# EAGLE board NCP1200 (EAGLE 6.2)
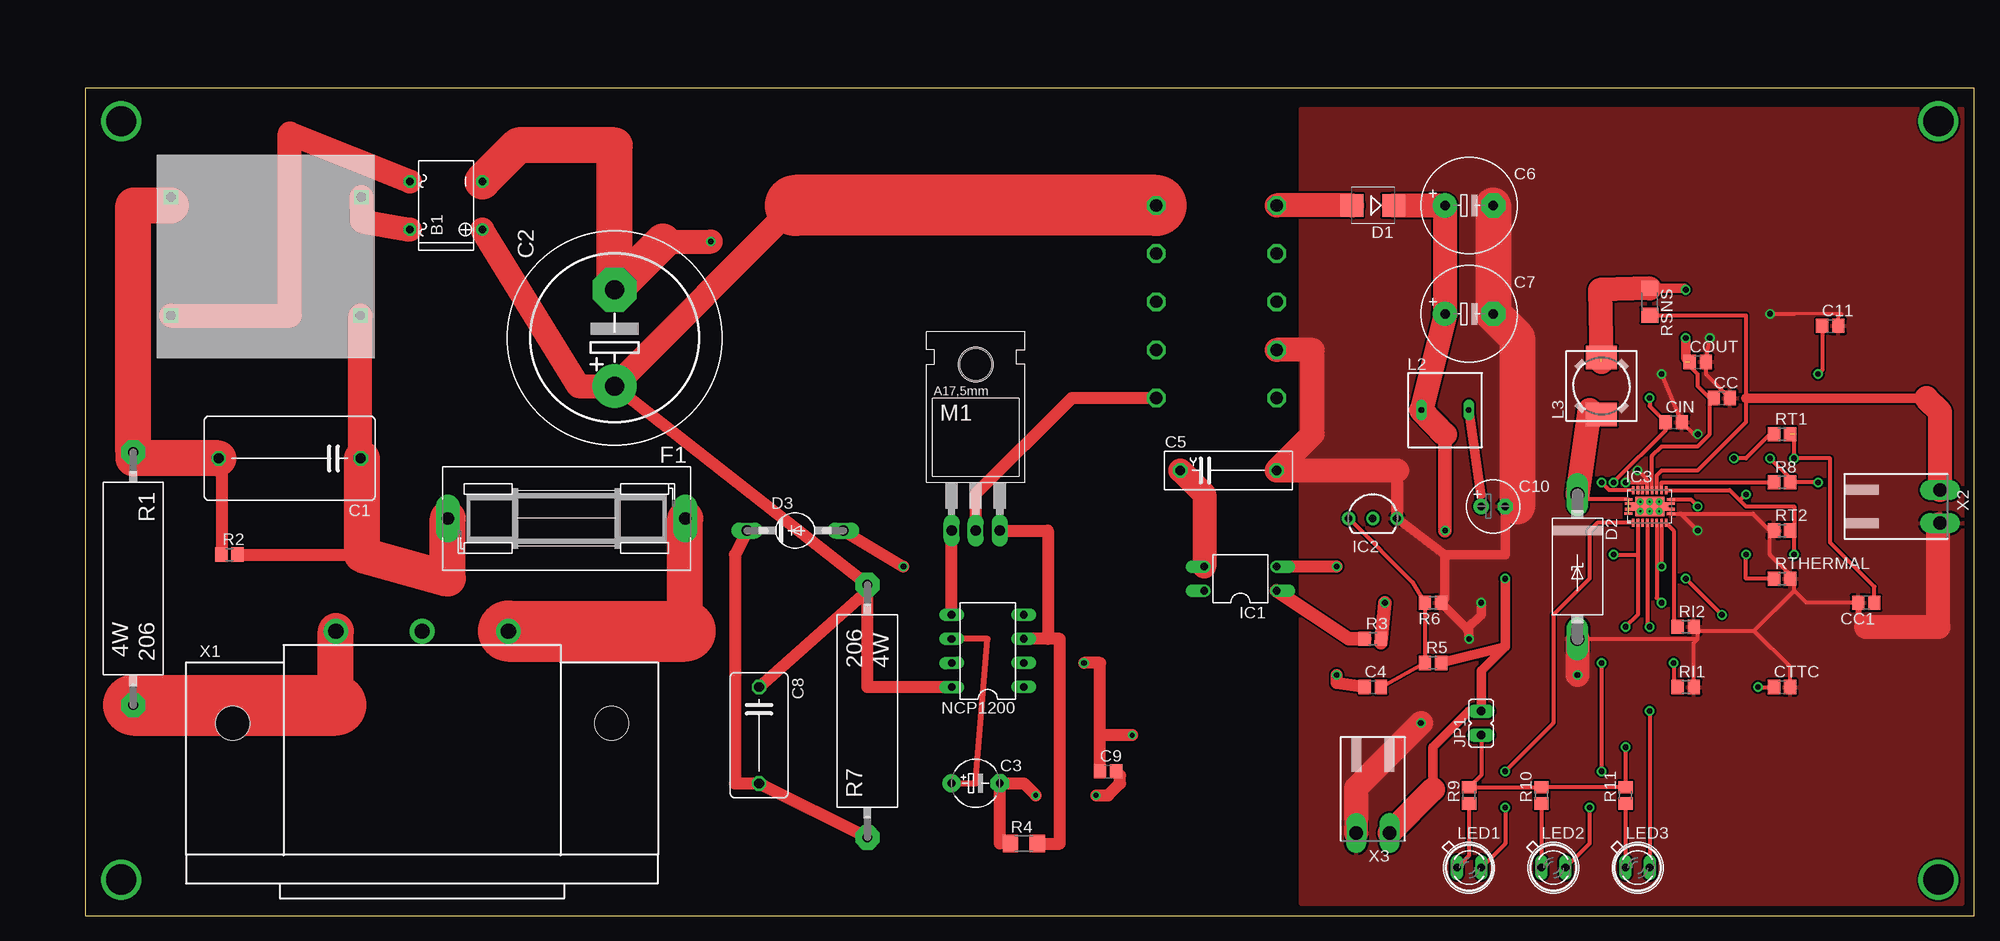
[diagram p0: board, top side]
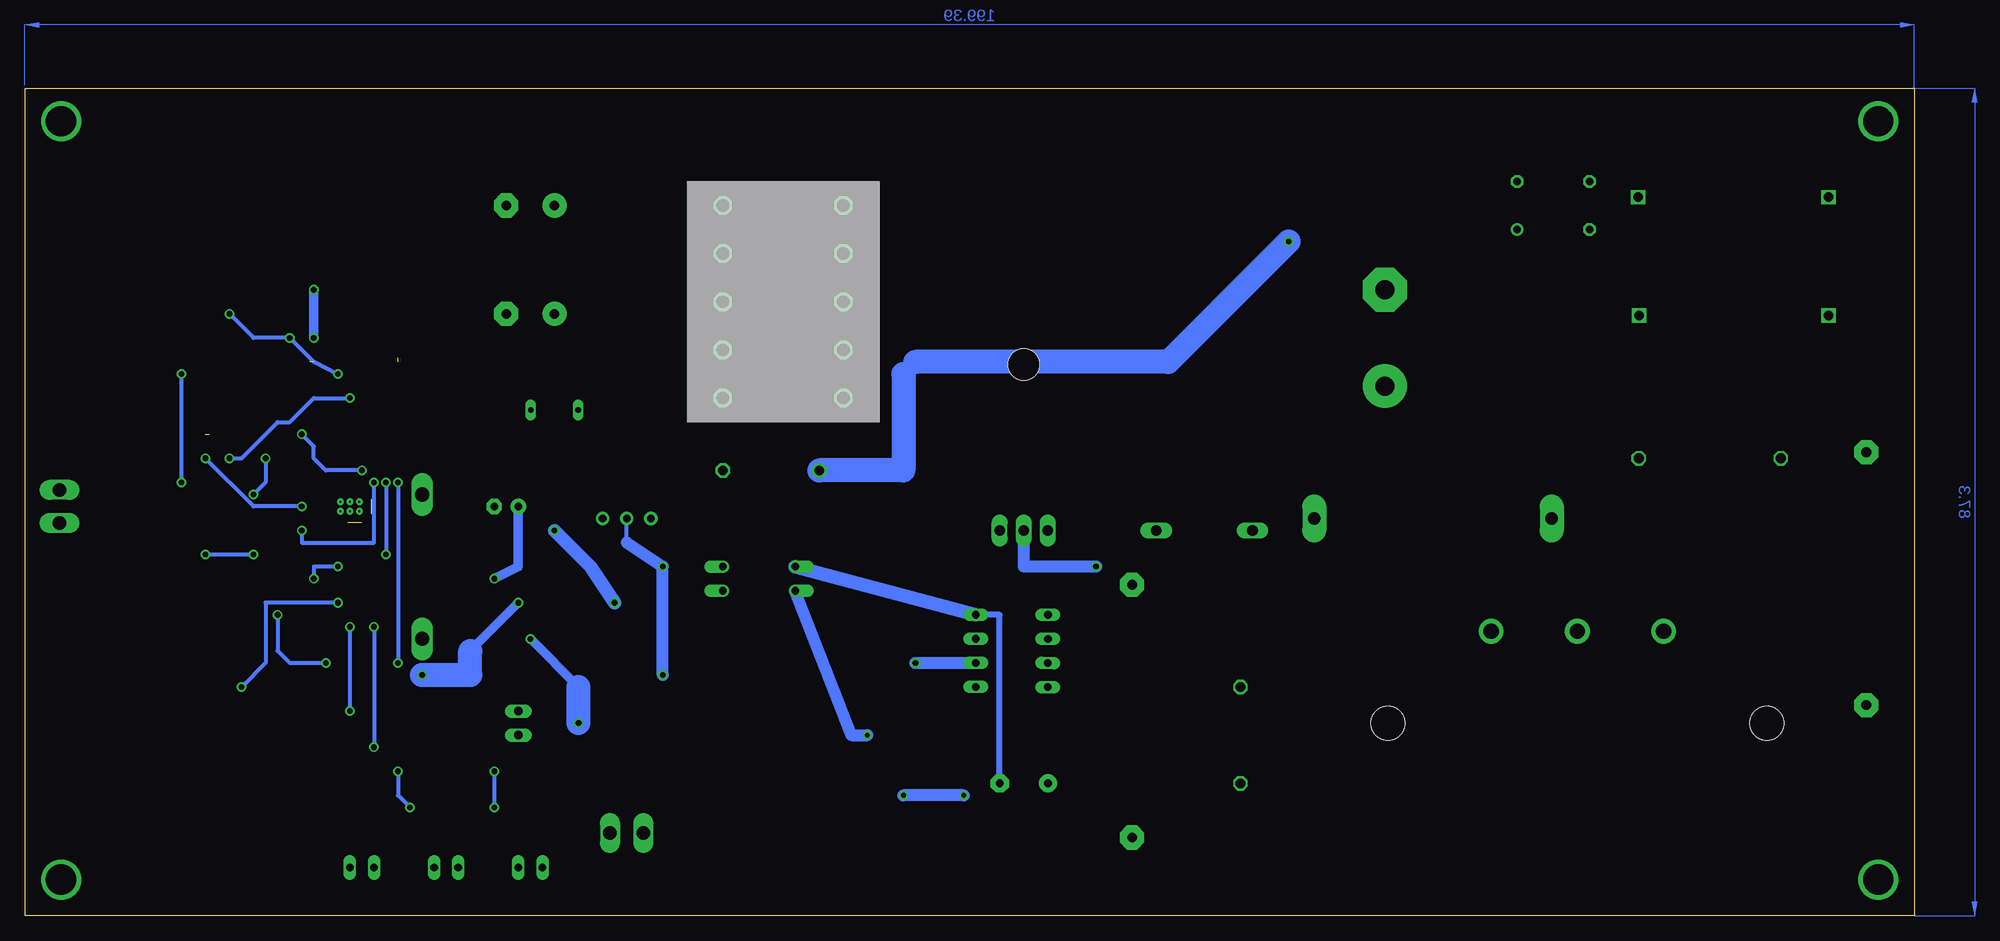
[diagram p1: board, bottom side, seen from below]

Size 199.37 x 87.3 mm. Coordinates in mm from the lower left corner, seen from the top.
Outline: 0,0 199.37,0 199.37,87.3 0,87.3 0,0
Copper layers (1*16): Top 0.035mm / dielectric 1.5mm / Bottom 0.035mm
Design rules: minimum track width 10mil, minimum drill 24mil, track to track 8mil, track to pad 8mil, pad to pad 8mil, via to via 8mil, smd to smd 8mil, copper to edge 40mil, drill to drill 8mil, minimum pad ring 10mil, minimum via ring 8mil, stop-mask expansion 4mil, vias tented up to drill 0mil, thermal gap 10mil

## Footprints (pad centres in the part's own frame; a part is rotated, then mirrored left to right if it is on the bottom)
B-DIL = drill 0.813: + -2.54,-3.81 | drill 0.813 octagon: - 2.54,-3.81; AC1 2.54,3.81; AC2 -2.54,3.81
C150-091X182 = drill 1.016 octagon: 1 -7.493,0; 2 7.493,0
EB22,5D = drill 2.007 pad 4.597: + -5.08,0 | drill 2.007 pad 4.597 octagon: - 5.08,0
E5-5 = drill 0.813 pad 1.905: + -2.54,0 | drill 0.813 pad 1.905 octagon: - 2.54,0
C0805 = smd 1.3 x 1.5: 1 -0.85,0; 2 0.85,0
YC10B4 = drill 1.016 octagon: 1 -5.08,0; 2 5.08,0
E5-10,5 = drill 1.016 pad 2.54: + -2.54,0 | drill 1.016 pad 2.54 octagon: - 2.54,0
C102-064X133 = drill 1.016 octagon: 1 -5.08,0; 2 5.08,0
E2,5-6 = drill 0.813 pad 1.6: + -1.27,0 | drill 0.813 pad 1.6 octagon: - 1.27,0
SMB = smd 2.4 x 2.4: A 2.2,0; C -2.2,0
C4111-15 = drill 1.499 long: A 7.62,0; C -7.62,0
SGA-10 = drill 1.118 long: A 5.08,0; C -5.08,0
SH25 = drill 1.321 pad 2.54 long: 1 -12.522,0; 2 12.522,0
DIL04 = drill 0.813 offset: 1 -1.27,-3.81; 2 1.27,-3.81; 3 1.27,3.81; 4 -1.27,3.81
LP_O-PBCY-W3 = drill 0.8 pad 1.4: 1 -2.54,0; 2 0,0; 3 2.54,0
QFN20_3,5X4,5 = smd 0.85 x 0.28: 1 -2.225,-0.75; 10 2.225,-0.75; 11 2.225,0.75; 20 -2.225,0.75 | smd 0.28 x 0.85: 2 -1.75,-1.725; 3 -1.25,-1.725; 4 -0.75,-1.725; 5 -0.25,-1.725; 6 0.25,-1.725; 7 0.75,-1.725; 8 1.25,-1.725; 9 1.75,-1.725; 12 1.75,1.725; 13 1.25,1.725; 14 0.75,1.725; 15 0.25,1.725; 16 -0.25,1.725; 17 -0.75,1.725; 18 -1.25,1.725; 19 -1.75,1.725 | smd 3.05 x 2.05: EXP 0,0 | drill 0.2 pad 0.3: EXP@1 -1,0.5; EXP@2 0,0.5; EXP@3 1,0.5; EXP@4 -1,-0.5; EXP@5 0,-0.5; EXP@6 1,-0.5 | smd 1.125 x 0.28: EXP@7 -2.075,0.3; EXP@8 -2.075,-0.3; EXP@9 2.075,0.3; EXP@10 2.075,-0.3 | smd 0.45 x 0.4: EXP@11 -1.75,0; EXP@12 1.75,0
JP1 = drill 0.914 long: 1 0,-1.27; 2 0,1.27
SD8 = drill 0.6 long: 1 -2.5,0; 2 2.5,0
DR73 = smd 2.5 x 3.25: 1 -3,0; 2 3,0
SFH482 = drill 0.813 long: A -1.27,0; K 1.27,0
TO220 = drill 1.118 long: 1 -2.54,-6.35; 2 0,-6.35; 3 2.54,-6.35 | hole 3.302: 0,11.176
DIL08 = drill 0.813 long: 1 -3.81,-3.81; 2 -1.27,-3.81; 3 1.27,-3.81; 4 3.81,-3.81; 5 3.81,3.81; 6 1.27,3.81; 7 -1.27,3.81; 8 -3.81,3.81
KH206-8 = drill 1.016 pad 2.54 octagon: 1 -13.335,0; 2 13.335,0
R0805 = smd 1.3 x 1.5: 1 -0.85,0; 2 0.85,0
R1206 = smd 1.6 x 1.803: 1 -1.422,0; 2 1.422,0
RENCO1 = drill 1.3 octagon: P1 -10.16,5.08; P2 -5.08,5.08; P3 0,5.08; P4 5.08,5.08; P5 10.16,5.08; P6 10.16,-7.62; P7 5.08,-7.62; P8 0,-7.62; P9 -5.08,-7.62; P10 -10.16,-7.62
L1CHO = drill 1 square: P1 -10,4; P2 10,4; P3 10,-8.5; P4 -10.1,-8.5
6ESRM-P = drill 1.6 pad 2.6: 1 -9.1,9.7; 2 0,9.7; 3 9.1,9.7 | hole 3.6: -20,0; 20,0
90-2 = drill 1.422 long: 1 -1.75,5.25; 2 1.75,5.25

## Placement (x,y rotation side)
B1  [B-DIL]  38.1,74.93 90 top
C1  1uF  [C150-091X182]  21.59,48.26 180 top
C2  47uF  [EB22,5D]  55.88,60.96 90 top
C3  22uF  [E5-5]  93.98,13.97 0 top
C4  100nF  [C0805]  135.89,24.13 0 top
C5  2.2nF  [YC10B4]  120.65,46.99 0 top
C6  470uF  [E5-10,5]  146.05,74.93 0 top
C7  470uF  [E5-10,5]  146.05,63.5 0 top
C8  10nF  [C102-064X133]  71.12,19.05 270 top
C9  1nF  [C0805]  107.95,15.24 0 top
C10  100uF  [E2,5-6]  148.59,43.18 0 top
C11  0.1uF  [C0805]  184.15,62.23 0 top
CC  0.1uF  [C0805]  172.72,54.61 0 top
CC1  0.1uF  [C0805]  187.96,33.02 180 top
CIN  10uF  [C0805]  167.64,52.07 0 top
COUT  10uF  [C0805]  170.18,58.42 0 top
CTTC  0.1uF  [C0805]  179.07,24.13 0 top
D1  MBR360T3  [SMB]  135.89,74.93 180 top
D2  MMBZ18VALT1  [C4111-15]  157.48,36.83 270 top
D3  MUR160  [SGA-10]  74.93,40.64 0 top
F1  [SH25]  50.8,41.91 180 top
IC1  PC817  [DIL04]  121.92,35.56 90 top
IC2  TL431  [LP_O-PBCY-W3]  135.89,41.91 0 top
IC3  BQ24123  [QFN20_3,5X4,5]  165.1,43.18 0 top
JP1  [JP1]  147.32,20.32 0 top
L2  22uH  [SD8]  143.51,53.34 0 top
L3  10uH  [DR73]  160.02,55.88 90 top
LED1  [SFH482]  146.05,5.08 0 top
LED2  [SFH482]  154.94,5.08 0 top
LED3  [SFH482]  163.83,5.08 0 top
M1  NDF03N60ZG  [TO220]  93.98,46.99 0 top
NCP1200  [DIL08]  95.25,27.94 90.1 top
R1  10  [KH206-8]  5.08,35.56 270 top
R2  1Meg  [R0805]  15.24,38.1 0 top
R3  560  [R0805]  135.89,29.21 0 top
R4  1.8  [R1206]  99.06,7.62 0 top
R5  3.9k  [R0805]  142.24,26.67 0 top
R6  1k  [R0805]  142.24,33.02 180 top
R7  22k  [KH206-8]  82.55,21.59 90 top
R8  10k  [R0805]  179.07,45.72 0 top
R9  1.5k  [R0805]  146.05,12.7 90 top
R10  1.5k  [R0805]  153.67,12.7 90 top
R11  1.5k  [R0805]  162.56,12.7 90 top
RI1  7.5k  [R0805]  168.91,24.13 0 top
RI2  7.5k  [R0805]  168.91,30.48 0 top
RSNS  0.1  [R1206]  165.1,64.77 270 top
RT1  9.31k  [R0805]  179.07,50.8 0 top
RT2  442k  [R0805]  179.07,40.64 0 top
RTHERMAL  [R0805]  179.07,35.56 0 top
U$1  RENCO1  [RENCO1]  118.11,64.77 270 bottom
U$2  L1CHO5  [L1CHO]  19.05,67.31 180 top
X1  6ESRM-P  [6ESRM-P]  35.56,20.32 0 top
X2  [90-2]  190.5,43.18 270 top
X3  [90-2]  135.89,13.97 180 top

## Library data of the parts
B1 = rectifier
C1-C11 CC CC1 CIN COUT CTTC R2-R6 R8-R11 RI1 RI2 RSNS RT1 RT2 RTHERMAL = resistor
D1-D3 = diode
F1 = fuse; MF: SCHURTER; MPN: 0031.8211; OC_FARNELL: 1162741; OC_NEWARK: 96B9380
IC1 = optocoupler; MPN: PC817X4J000F; OC_FARNELL: 9707727; OC_NEWARK: 97K7059
IC2 = texas; OC_FARNELL: unknown; OC_NEWARK: unknown
IC3 = texas; MPN: BQ24123RHLT; OC_FARNELL: 1407131; OC_NEWARK: 84K0851
JP1 = jumper
L2 = inductor-neosid; OC_FARNELL: unknown; OC_NEWARK: unknown
L3 = inductors
LED1-LED3 = led
M1 = transistor-fet
NCP1200 = ic-package
R1 R7 = resistor-power; OC_FARNELL: unknown; OC_NEWARK: unknown
U$1 = renco
U$2 = l1choke
X1 = con-tycoelectronics; MF: TYCO ELECTRONICS; MPN: 6ESRM-P; OC_FARNELL: unknown; OC_NEWARK: 87F1821
X2 X3 = con-weidmueller-sl35; OC_FARNELL: unknown; OC_NEWARK: unknown

## Nets
GND: C5.2 C6.- C7.- C10.- C11.2 CC1.2 CC.2 CIN.2 COUT.2 CTTC.2 D2.A IC2.3 IC3.10 IC3.16 IC3.17 IC3.18 R6.1 RI1.2 RI2.2 RT2.1 RTHERMAL.2 U$1.P7 X2.2 X3.2
N$1: D2.C IC3.1 IC3.20 L3.1
N$2: C1.2 R1.1 R2.1 U$2.P3
N$3: CC.1 COUT.1 IC3.15 L3.2 RSNS.1
N$4: B1.AC1 U$2.P2
N$5: B1.AC2 U$2.P4
N$6: IC3.8 RI1.1
N$7: B1.+ C2.+ C8.1 NCP1200.8 R7.2 U$1.P1
N$8: C9.1 IC1.4 NCP1200.2
N$9: M1.1 NCP1200.5
N$10: M1.3 NCP1200.3 R4.2
N$11: C3.+ NCP1200.6
N$12: C11.1 CIN.1 IC3.3 IC3.4 IC3.6 JP1.1 R8.2 R9.2 R10.2 R11.2
N$13: D1.A U$1.P10
N$14: C8.2 D3.C R7.1
N$15: D3.A M1.2 U$1.P5
N$16: C6.+ C7.+ D1.C L2.1 R3.2
N$17: IC1.1 R3.1
N$18: IC3.9 RI2.1
N$19: C4.2 IC2.1 R5.1 R6.2
N$20: C4.1 IC1.2 IC2.2
N$21: IC3.12 RT1.1 RT2.2 RTHERMAL.1
N$22: CC1.1 IC3.11 RT1.2
N$23: LED3.A R11.1
N$24: LED2.A R10.1
N$25: LED1.A R9.1
N$26: IC3.2 LED1.K
N$27: IC3.19 LED2.K
N$28: IC3.5 LED3.K
N$29: CTTC.1 IC3.7
N$30: IC3.13 R8.1
N$31: C1.1 F1.2 R2.2 U$2.P1
N$32: R1.2 X1.1
N$33: IC3.14 RSNS.2 X2.1
N$34: F1.1 X1.3
N$35: C10.+ JP1.2 L2.2 R5.2 X3.1
PE: B1.- C2.- C3.- C5.1 C9.2 IC1.3 NCP1200.4 R4.1

## Tracks (layer width: path | path; a pad name or v marks a point on that pad's centre or on a via)
GND  (via drill 0.6)
  Top 0.305: C11.2 185,63.08 185.42,63.5 180.34,63.5
  Top 0.406: v171.45,60.96 COUT.2 171.03,57.15 CC.2 | v177.8,63.5 180.34,63.5 | v166.37,57.15 CIN.2 169.76,50.8 v170.18,50.8 | 177.8,40.64 176.01,42.43 IC3.10 168.39,42.43 v170.18,40.64 | IC3.16 164.85,45.72 | 164.85,45.72 164.85,45.97 v163.83,46.99 | D2.A 170.18,29.21 | 170.18,29.21 170.18,30.06 | 170.18,30.06 RI2.2 | RI1.2 169.76,28.79 170.18,29.21 | 170.18,30.06 176.11,30.06 | 176.11,30.06 180.34,34.29 | 180.34,34.29 180.34,35.56 | CTTC.2 179.92,26.25 176.11,30.06 | 195.75,40.81 X2.2 195.58,41.26 | 180.34,34.29 181.61,33.02 CC1.2 187.11,32.84 | 187.11,31.33 187.96,30.48 | RTHERMAL.2 179.92,35.98 177.8,38.1 177.8,40.22 RT2.1 | v162.56,45.72 164.85,45.72 | 151.13,43.18 C10.- | R6.1 143.51,33.44 | 146.05,30.06 145.84,30.27
  Top 0.61: CC1.2 187.11,31.33
  Top 1.016: IC2.3 143.51,38.1 | 143.51,38.1 149.86,38.1 C10.- | 143.51,33.44 143.51,38.1 | v146.05,29.21 146.05,30.06 | R6.1 145.84,30.27 147.32,31.75 v147.32,33.02
  Top 1.27: 138.43,46.99 IC2.3
  Top 2.54: 187.96,30.48 195.58,30.48 195.58,41.26 | U$1.P7 129.54,59.69 129.54,50.8 C5.2 138.43,46.99 | X3.2 134.14,13.49 v140.97,20.32 | D2.A v157.48,25.4
  Top 3.81: C6.- C7.- 151.13,60.96 151.13,43.18
  Bottom 0.406: v177.8,63.5 175.26,60.96 v171.45,60.96 168.91,58.42 v166.37,57.15 | v163.83,46.99 167.64,46.99 168.91,48.26 168.91,49.53 v170.18,50.8 | v170.18,40.64 170.18,39.37 162.56,39.37 v162.56,45.72
  Bottom 1.016: 140.97,24.13 v146.05,29.21 | 152.4,27.94 v147.32,33.02
  Bottom 2.54: v140.97,20.32 140.97,24.13 | v157.48,25.4 152.4,25.4 152.4,27.94
  pour Top: 198.12,1.27 198.12,85.09 128.27,85.09 128.27,1.27
N$1  (1 unrouted)
  Top 0.406: L3.1 158.75,53.34 | IC3.20 158,43.93 D2.C
  Top 2.54: 158.75,53.34 D2.C
N$2
  Top 0.406: C1.2 14.39,48.26 | 5.08,48.26 R1.1 | 9.05,74.93 U$2.P3
  Top 1.27: 14.39,48.26 R2.1
  Top 3.81: C1.2 5.08,48.26 | R1.1 5.08,74.93 9.05,74.93
N$3  (via drill 0.6)  (2 unrouted)
  Top 0.406: IC3.15 165.35,48.51 166.37,49.53 170.18,49.53 171.45,50.8 171.45,54.19 CC.1 171.45,54.61 170.18,55.88 170.18,57.15 168.91,58.42 | 168.76,66.19 v168.91,66.04 | 168.91,58.84 COUT.1
  Top 1.016: RSNS.1 168.76,66.19 | v168.91,60.96 168.91,58.84
  Top 2.54: RSNS.1 159.87,66.04 160.02,58.42
  Bottom 1.016: v168.91,66.04 v168.91,60.96
N$4
  Top 2.54: U$2.P2 21.59,63.31 21.59,82.55 B1.AC1
N$5
  Top 2.54: U$2.P4 29.21,73.27 B1.AC2
N$6  (via drill 0.6)
  Top 0.406: IC3.8 166.35,36.85 v166.37,36.83 | v168.91,35.56 v172.72,31.75 | v167.64,26.67 167.64,24.55 RI1.1
  Bottom 0.406: v166.37,36.83 168.91,36.83 v168.91,35.56 | v172.72,31.75 172.72,27.94 171.45,26.67 v167.64,26.67
N$7
  Top 0.406: 82.55,34.29 R7.2
  Top 1.27: C8.1 82.55,34.29 82.55,24.12 NCP1200.8 | C2.+ R7.2
  Top 2.54: B1.+ 52.07,55.88 C2.+ 74.93,74.93
  Top 6.452: U$1.P1 74.93,74.93
N$8  (via drill 0.5, 0.6)
  Top 1.27: C9.1 107.1,19.05 | 107.1,19.05 107.1,26.67 v105.41,26.67 | v110.49,19.05 107.1,19.05
  Bottom 0.406: v105.41,26.67 v105.41,26.68
  Bottom 1.27: v105.41,26.68 NCP1200.2 | IC1.4 112.18,19.05 v110.49,19.05
N$9
  Top 0.406: NCP1200.5
  Top 1.27: NCP1200.5 M1.1
N$10
  Top 0.406: NCP1200.3
  Top 1.27: R4.2 102.87,7.62 102.87,29.21 101.6,29.21 | 101.6,29.21 NCP1200.3 | M1.3 101.6,40.64 101.6,29.21
N$11
  Top 0.406: NCP1200.6
  Top 0.61: C3.+ 93.98,13.97 95.25,29.21 NCP1200.6
N$12  (via drill 0.6)  (2 unrouted)
  Top 0.406: v161.29,45.72 166.79,51.22 CIN.1 165.1,53.76 v165.1,54.61 | v161.29,38.1 163.83,38.1 | IC3.3 163.83,41.44 163.83,38.1 | C11.1 183.3,57.57 v182.88,57.15 | v182.88,45.72 R8.2 179.92,46.14 v177.8,48.26 | 163.83,38.1 163.83,31.75 v162.56,30.48 | v162.56,17.78 R11.2 R10.2 R9.2 147.32,14.82 JP1.1
  Bottom 0.406: v161.29,45.72 v161.29,38.1 | v182.88,57.15 v182.88,45.72 | v177.8,48.26 176.53,48.26 172.72,52.07 171.45,52.07 168.91,54.61 v165.1,54.61 | v162.56,30.48 v162.56,17.78
N$13
  Top 2.54: D1.A U$1.P10
N$14
  Top 1.27: D3.C 68.58,38.1 68.58,13.97 C8.2 R7.1
N$15  (via drill 0.6)
  Top 1.27: D3.A v86.36,36.83 | U$1.P5 104.14,54.61 93.98,44.45 M1.2
  Bottom 1.27: v86.36,36.83 93.98,36.83 M1.2
N$16  (via drill 0.6)
  Top 0.406: C7.+ 143.55,63.46 | 136.74,28.79 R3.2
  Top 1.422: 143.51,50.76 v143.51,40.64 | v137.16,33.02 136.74,28.79
  Top 2.54: D1.C C6.+ C7.+ | 143.55,63.46 L2.1 143.51,50.76
  Bottom 1.422: v143.51,40.64 139.7,36.83 v137.16,33.02
N$17
  Top 1.422: IC1.1 133.35,29.21 R3.1
N$18
  Top 0.406: IC3.9 166.85,41.43 167.64,40.64 167.64,30.9 RI2.1
N$19
  Top 0.406: IC2.1 140.12,35.14 R6.2 R5.1 C4.2
N$20  (via drill 0.6)
  Top 1.27: C4.1 132.08,24.55 v132.08,25.4 | v132.08,36.83 IC1.2
  Bottom 0.406: 135.89,39.37 IC2.2
  Bottom 1.27: v132.08,25.4 v132.08,36.83 135.89,39.37
N$21  (via drill 0.6)
  Top 0.406: IC3.12 173.53,44.91 174.62,43.81 | 174.62,43.81 175.26,43.18 180.34,43.18 180.34,41.06 RT2.2 180.34,40.64 v180.34,38.1 | RT1.1 177.8,50.8 175.26,48.26 v173.99,48.26 | v175.26,44.45 174.62,43.81 | RTHERMAL.1 175.26,35.56 v175.26,38.1
  Bottom 0.406: v173.99,48.26 173.99,45.72 v175.26,44.45 | v175.26,38.1 v180.34,38.1
N$22  (via drill 0.6)  (1 unrouted)
  Top 0.406: IC3.11 169.43,43.93 v170.18,43.18 | 180.34,50.8 v180.34,48.26 184.15,48.26 184.15,39.37 188.81,34.71 CC1.1
  Bottom 0.406: v170.18,43.18 175.26,43.18 v180.34,48.26
N$23
  Top 0.406: R11.1 LED3.A
N$24
  Top 0.406: R10.1 LED2.A
N$25
  Top 0.406: R9.1 146.05,6.35 LED1.A
N$26  (via drill 0.6)
  Top 0.406: IC3.2 159.56,41.45 158.75,40.64 158.75,35.56 154.94,31.75 154.94,20.32 v149.86,15.24 | v149.86,11.43 149.86,7.62 LED1.K
  Bottom 0.406: v149.86,15.24 v149.86,11.43
N$27  (via drill 0.6)
  Top 0.406: IC3.19 160.84,44.91 v160.02,45.72 | v160.02,26.67 v160.02,15.24 | v158.75,11.43 158.75,7.62 LED2.K
  Bottom 0.406: v160.02,45.72 v160.02,26.67 | v160.02,15.24 160.02,12.7 v158.75,11.43
N$28  (via drill 0.6)
  Top 0.406: IC3.5 164.85,30.73 v165.1,30.48 | v165.1,21.59 LED3.K
  Bottom 0.406: v165.1,30.48 v165.1,21.59
N$29  (via drill 0.6)
  Top 0.406: IC3.7 165.85,33.54 v166.37,33.02 | v176.53,24.13 CTTC.1
  Bottom 0.406: v166.37,33.02 173.99,33.02 173.99,26.67 v176.53,24.13
N$30
  Top 0.406: IC3.13 166.35,45.7 166.37,45.72 R8.1
N$31
  Top 0.406: 29.21,48.26 C1.1 29.05,48.26
  Top 1.27: R2.2 29.21,38.1
  Top 2.54: 29.05,48.26 U$2.P1
  Top 3.81: F1.2 38.28,35.56 29.21,38.1 29.21,48.26
N$32
  Top 3.81: 26.46,22.23 X1.1
  Top 6.452: R1.2 26.46,22.23
N$33
  Top 0.406: RSNS.2 175.26,63.35 175.26,54.61 175.26,52.07 170.18,46.99 166.37,46.99 165.85,46.47 IC3.14
  Top 1.016: 194.31,54.61 175.26,54.61
  Top 2.54: X2.1 195.75,53.17 194.31,54.61
N$34
  Top 3.81: 63.32,30.02 F1.1
  Top 6.452: X1.3 63.32,30.02
N$35  (via drill 0.6)
  Top 0.406: C10.+ 147.28,44.41
  Top 1.016: 147.28,44.41 L2.2 | R5.2 149.86,28.36 | 149.86,28.36 v149.86,35.56 | 149.86,28.36 147.32,25.82 JP1.2 146.05,21.59 142.24,17.78 142.24,13.32
  Top 2.54: 142.24,13.32 X3.1
  Bottom 1.016: v149.86,35.56 147.32,36.83 C10.+
N$37  (via drill 3.2)
  other vias: 3.81,83.82
N$38  (via drill 3.2)
  other vias: 195.58,83.82
N$39  (via drill 3.2)
  other vias: 195.58,3.81
N$40  (via drill 3.2)
  other vias: 3.81,3.81
PE  (via drill 0.5, 0.6)
  Top 0.305: 109.22,14.82 C9.2
  Top 0.406: R4.1 96.52,7.62
  Top 1.27: 96.52,7.62 C3.- 99.06,13.97 v100.33,12.7 | v106.68,12.7 107.95,12.7 109.22,13.97 109.22,14.82
  Top 2.54: C5.1 118.11,44.45 IC1.3 | 60.96,71.12 v66.04,71.12
  Top 3.81: 60.96,71.12 C2.- 55.88,81.28 45.72,81.28 B1.-
  Bottom 0.406: 105.41,58.42 106.68,57.15
  Bottom 0.61: C3.- 96.52,31.75 NCP1200.4
  Bottom 1.27: v100.33,12.7 v106.68,12.7
  Bottom 1.422: NCP1200.4 IC1.3
  Bottom 2.54: v66.04,71.12 78.74,58.42 105.41,58.42 | 106.68,57.15 106.68,46.99 C5.1
(copper drawn outside any net)
  shapes: Bottom area x2